# EAGLE board uRings_SE_Assembly_Template (EAGLE 9.6.2)
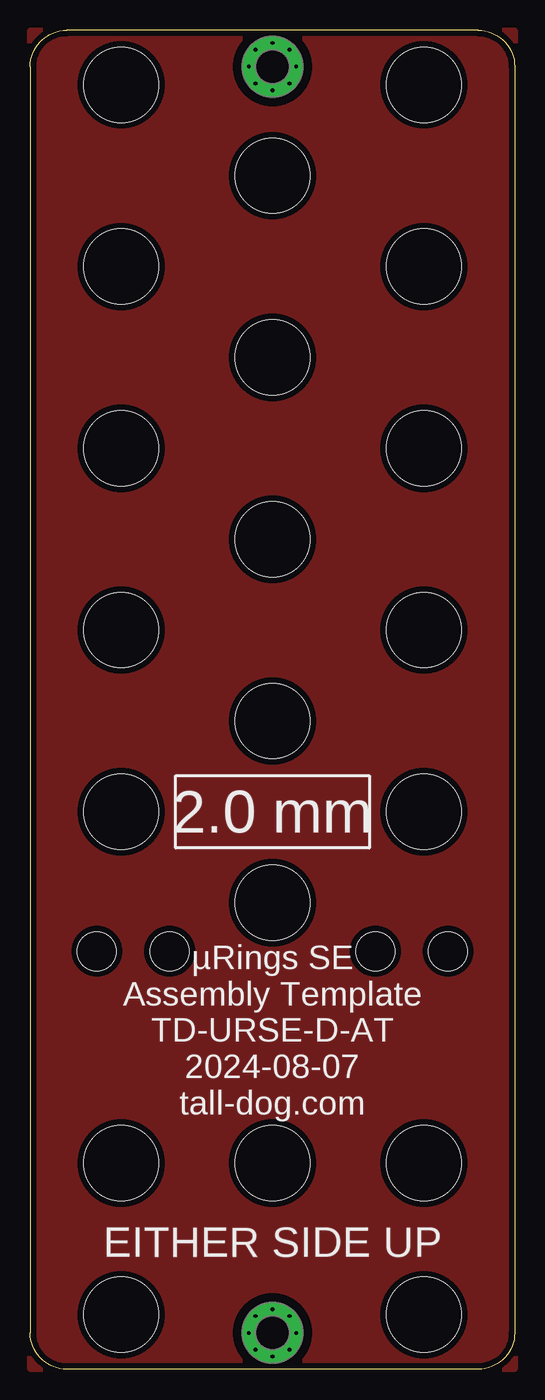
[diagram p0: board, top side]
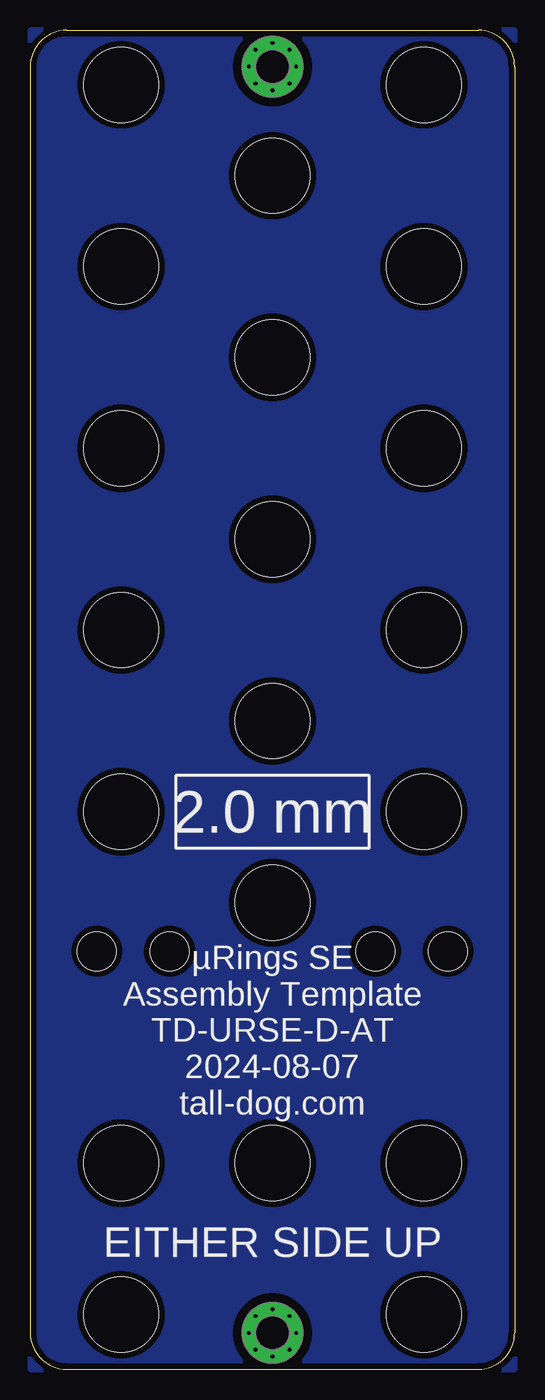
[diagram p1: board, bottom side, seen from below]

Size 40 x 110.5 mm. Coordinates in mm from the lower left corner, seen from the top.
Outline: 37,110.5 3,110.5 arc90 0,107.5 0,3 arc90 3,0 37,0 arc90 40,3 40,107.5 arc90 37,110.5
Copper layers (1*16): Top 0.035mm / dielectric 1.5mm / Bottom 0.035mm
Design rules "default *": minimum track width 10mil, minimum drill 0.3mm, track to track 8mil, track to pad 8mil, pad to pad 8mil, via to via 8mil, smd to smd 8mil, copper to edge 0.25mm, drill to drill 8mil, minimum pad ring 6mil, minimum via ring 6mil, stop-mask expansion 0mil, vias tented up to drill 0mil, thermal gap 10mil
Holes 3.2 mm at 11.5,34.5 28.5,34.5 5.5,34.5 34.5,34.5
Holes 6.2 mm at 7.5,106 7.5,91 7.5,76 7.5,61 7.5,46 7.5,17 20,17 32.5,17 7.5,4.5 32.5,4.5 20,98.5 32.5,106 32.5,91 20,83.5 32.5,76 20,68.5 32.5,61 20,53.5 32.5,46 20,38.5

## Footprints (pad centres in the part's own frame; a part is rotated, then mirrored left to right if it is on the bottom)
M2.5-HOLE = drill 2.75 pad 5: P$1 0,0 | drill 0.3: P$2 0,1.95; P$3 0,-1.95; P$4 -1.95,0; P$5 1.95,0; P$6 1.4,1.4; P$7 -1.4,1.4; P$8 -1.4,-1.4; P$9 1.4,-1.4

## Placement (x,y rotation side)
E$1  [M2.5-HOLE]  20,107.5 0 top
E$2  [M2.5-HOLE]  20,3 0 top

## Library data of the parts
E$1 E$2 = uRings_SE_Library

## Tracks (layer width: path | path; a pad name or v marks a point on that pad's centre or on a via)
GND
  pour Top (isolate 0.5): 0,110.5 40,110.5 40,0 0,0
  pour Bottom (isolate 0.5): 0,110.5 40,110.5 40,0 0,0

## Text on the board
tPlace: 2.0 mm | µRings SE / Assembly Template / TD-URSE-D-AT / 2024-08-07 / tall-dog.com | EITHER SIDE UP
bPlace: 2.0 mm | µRings SE / Assembly Template / TD-URSE-D-AT / 2024-08-07 / tall-dog.com | EITHER SIDE UP